# Altium PCB PCB.PcbDoc
Units mm, origin at the board's own origin, x right, y up, seen from the top; angles counter-clockwise.
Board outline 27.08 x 21.59 mm, 2 copper layers (Top Layer, Bottom Layer); 22 components, 20 nets, 42 pads, 0 vias.
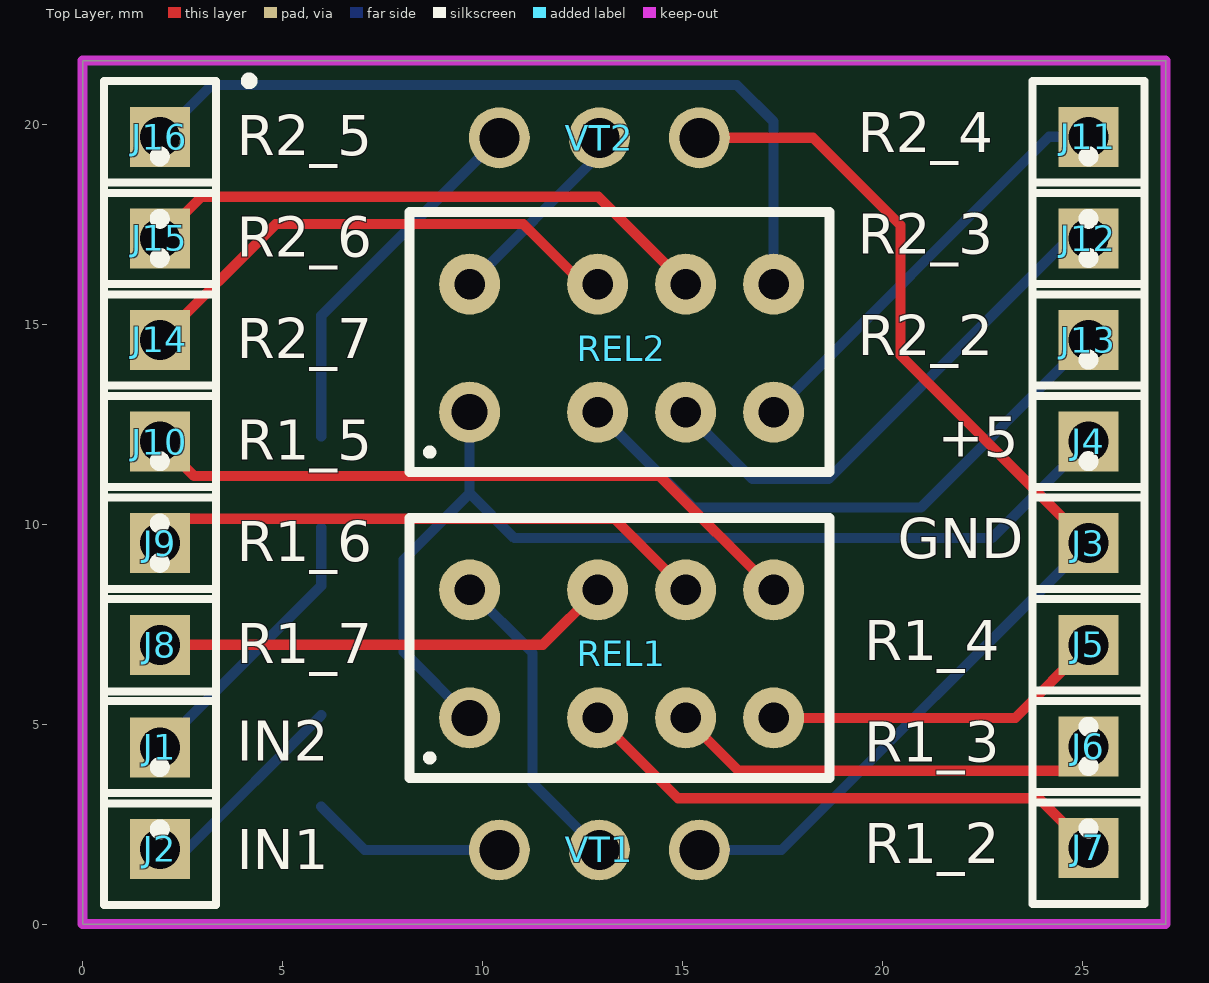
[diagram p0: Top Layer view]
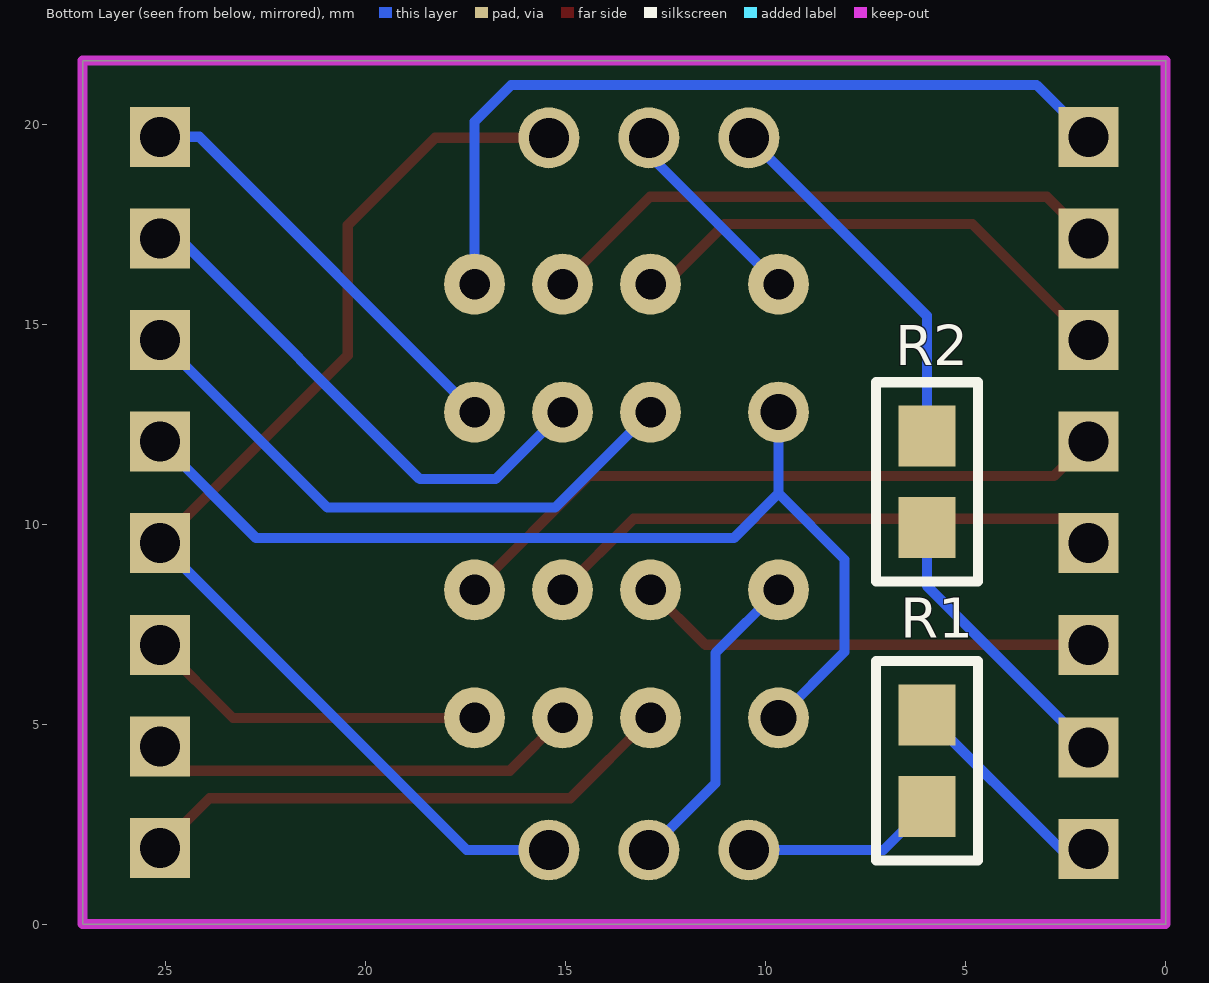
[diagram p1: Bottom Layer view, seen from below]

## Layer stack, top to bottom
Top Solder: solder mask 0.0102, Solder Resist, Dk 3.5
Top Layer: signal copper 0.0356
Dielectric 1: dielectric 0.32, FR-4, Dk 4.8
Bottom Layer: signal copper 0.0356
Bottom Solder: solder mask 0.0102, Solder Resist, Dk 3.5

## Board outline
0,0 27.076,0 27.076,21.59 0,21.59

## Design rules (kind name [scope] priority, off if disabled: settings)
Clearance [All] p1: gap=0.254
PolygonConnect [All] p1: connectstyle=Relief reliefconductorwidth=0.254 reliefentries=4 polygonreliefangle="90 Angle" airgapwidth=0.254
RoutingVias [All] p1: holewidth=0.711 width=1.27 viastyle="Through Hole" minholewidth=0.711 minwidth=1.27 maxholewidth=0.711 maxwidth=1.27
SolderMaskExpansion [All] p1: expansion=0.102
Width [All] p1: maxlimit=1.5 minlimit=0.127 preferedwidth=0.254
29 further rules are at their usual default settings.

## Components (designator, comment, footprint, x,y, rotation, side; value= is the part's Value field where it differs from the comment)
J1 "IN2" PIN1 1.93,4.42 r180 top
J2 "IN1" PIN1 1.93,1.88 r0 top
J3 "GND" PIN1 25.146,9.525 r0 top
J4 "+5" PIN1 25.146,12.065 r0 top
J5 "R1_4" PIN1 25.146,6.985 r180 top
J6 "R1_3" PIN1 25.146,4.445 r180 top
J7 "R1_2" PIN1 25.146,1.905 r0 top
J8 "R1_7" PIN1 1.93,6.985 r0 top
J9 "R1_6" PIN1 1.93,9.525 r0 top
J10 "R1_5" PIN1 1.93,12.065 r180 top
J11 "R2_4" PIN1 25.146,19.685 r180 top
J12 "R2_3" PIN1 25.146,17.145 r0 top
J13 "R2_2" PIN1 25.146,14.605 r0 top
J14 "R2_7" PIN1 1.93,14.605 r0 top
J15 "R2_6" PIN1 1.93,17.145 r0 top
J16 "R2_5" PIN1 1.93,19.685 r180 top
R1 "510" RES 7.214,1.6 r180 bottom
R2 "510" RES 4.724,13.538 r0 bottom
REL1 "IM03TS" IM03TS 9.677,5.156 r0 top
REL2 "IM03TS" IM03TS 9.677,12.802 r0 top
VT1 "КТ315" KT315 10.418,1.854 r0 top
VT2 "КТ315" KT315 10.418,19.66 r0 top

## Footprints (in the part's own frame and the unit in brackets; to place one, negate y for a bottom-side part, rotate by r counter-clockwise, add the part's x,y. Pads: shape width x height; smd on the part's side, far side on the other; paste and mask are expansions set on the pad)
IM03TS [mil] "IM03TS"
  round 60 hole 35.43: 1(0,0)
  round 60 hole 30: 2(125.98,0) 3(212.6,0) 4(299.21,0) 5(299.21,125.98) 6(212.6,125.98) 7(125.98,125.98) 8(0,125.98)
  silkscreen extent -59,-59 354,197
KT315 [mil] "KT315"
  round 60 hole 39.37: 1(0,0) 2(98.43,0) 3(196.85,0)
PIN1 [mm] "Connector; Plug"
  rect 1.5x1.5 hole 1: 1(0,0)
  silkscreen extent -1.4,-1.4 1.4,2.17
RES [mil] "FROM_MAX"
  rect 55.98x60 smd: 1(49,52.71) 2(49,142.71)
  silkscreen extent -1,0 99,196, body extent 17,19 81,177, height 100

## Part data
J1 J2 J3 J4 J5 J6 J7 J8 J9 J10 J11 J12 J13 J14 J15 J16: library part Socket, "Socket"
R1 R2: library part RES

## Nets (pads, with @x,y where several pads share a name; then routed paths per layer and width w, separated by ;. In a path a pad name is that pad's centre, name@x,y a point inside that pad or via, vN(x,y) a via of type N, cw(c..) or ccw(c..) an arc to the next point about the centre after c; other vN are vias at no path point)
GND: J3.1 VT1.3 VT2.3 | length 28.7
  Top Layer w0.254: VT2.3 18.263,19.66 20.447,17.475 20.447,14.224 J3.1
  Bottom Layer w0.254: VT1.3 17.475,1.854 J3.1
NetJ1_1: J1.1 R2.2 | length 7.2
  Bottom Layer w0.254: J1.1 5.969,8.458 R2.2
NetJ2_1: J2.1 R1.2 | length 5.4
  Bottom Layer w0.254: J2.1 2.624,1.88 R1.2
NetJ5_1: J5.1 REL1.4 | length 8.6
  Top Layer w0.254: REL1.4 23.317,5.156 J5.1
NetJ6_1: J6.1 REL1.3 | length 10.9
  Top Layer w0.254: REL1.3 16.398,3.835 24.536,3.835 J6.1
NetJ7_1: J7.1 REL1.2 | length 13.6
  Top Layer w0.254: REL1.2 14.884,3.15 23.901,3.15 J7.1
NetJ8_1: J8.1 REL1.7 | length 11.5
  Top Layer w0.254: J8.1 11.506,6.985 REL1.7
NetJ9_1: J9.1 REL1.6 | length 14.1
  Top Layer w0.254: J9.1 2.54,10.135 13.299,10.135 REL1.6
NetJ10_1: J10.1 REL1.5 | length 16.9
  Top Layer w0.254: J10.1 2.794,11.201 14.432,11.201 REL1.5
NetJ11_1: J11.1 REL2.4 | length 11
  Bottom Layer w0.254: REL2.4@17.277,12.491 REL2.4 24.161,19.685 J11.1
NetJ12_1: J12.1 REL2.3 | length 13.3
  Bottom Layer w0.254: REL2.3 16.754,11.125 18.644,11.125 24.663,17.145 J12.1
NetJ13_1: J13.1 REL2.2 | length 15
  Bottom Layer w0.254: REL2.2 15.265,10.414 20.955,10.414 J13.1
NetJ14_1: J14.1 REL2.7 | length 12.8
  Top Layer w0.254: J14.1 4.826,17.501 11.024,17.501 12.523,16.002 REL2.7
NetJ15_1: J15.1 REL2.6 | length 14.5
  Top Layer w0.254: J15.1 2.972,18.186 12.893,18.186 REL2.6
NetJ16_1: J16.1 REL2.5 | length 20.3
  Bottom Layer w0.254: J16.1 3.226,20.98 16.358,20.98 17.277,20.061 REL2.5
NetR1_1: R1.1 VT1.1 | length 4.9
  Bottom Layer w0.254: R1.1 7.054,1.854 VT1.1
NetR2_1: R2.1 VT2.1 | length 9.3
  Bottom Layer w0.254: R2.1 5.969,15.211 VT2.1
NetREL1_8: REL1.8 VT1.2 | length 7.8
  Bottom Layer w0.254: REL1.8 11.252,6.781 11.252,3.52 VT1.2
NetREL2_8: REL2.8 VT2.2 | length 5
  Bottom Layer w0.254: REL2.8 12.918,19.242 VT2.2
VCC: J4.1 REL1.1 REL2.1 | length 25.9
  Bottom Layer w0.254: REL1.1 8.026,6.807 8.026,9.119 9.677,10.77 ; REL2.1 9.677,10.77 ; J4.1 22.733,9.652 10.795,9.652 9.677,10.77

## Keep-outs
Keep-Out Layer:
  the board outline again, w0.254

## Silkscreen, mask and mechanical layers (free items; w line width, h text height)
Top Overlay:
  circle w0.254: c4.166,21.082 r0.08